# EAGLE board Relay_Dio Faziko Pratama (EAGLE 9.6.2)
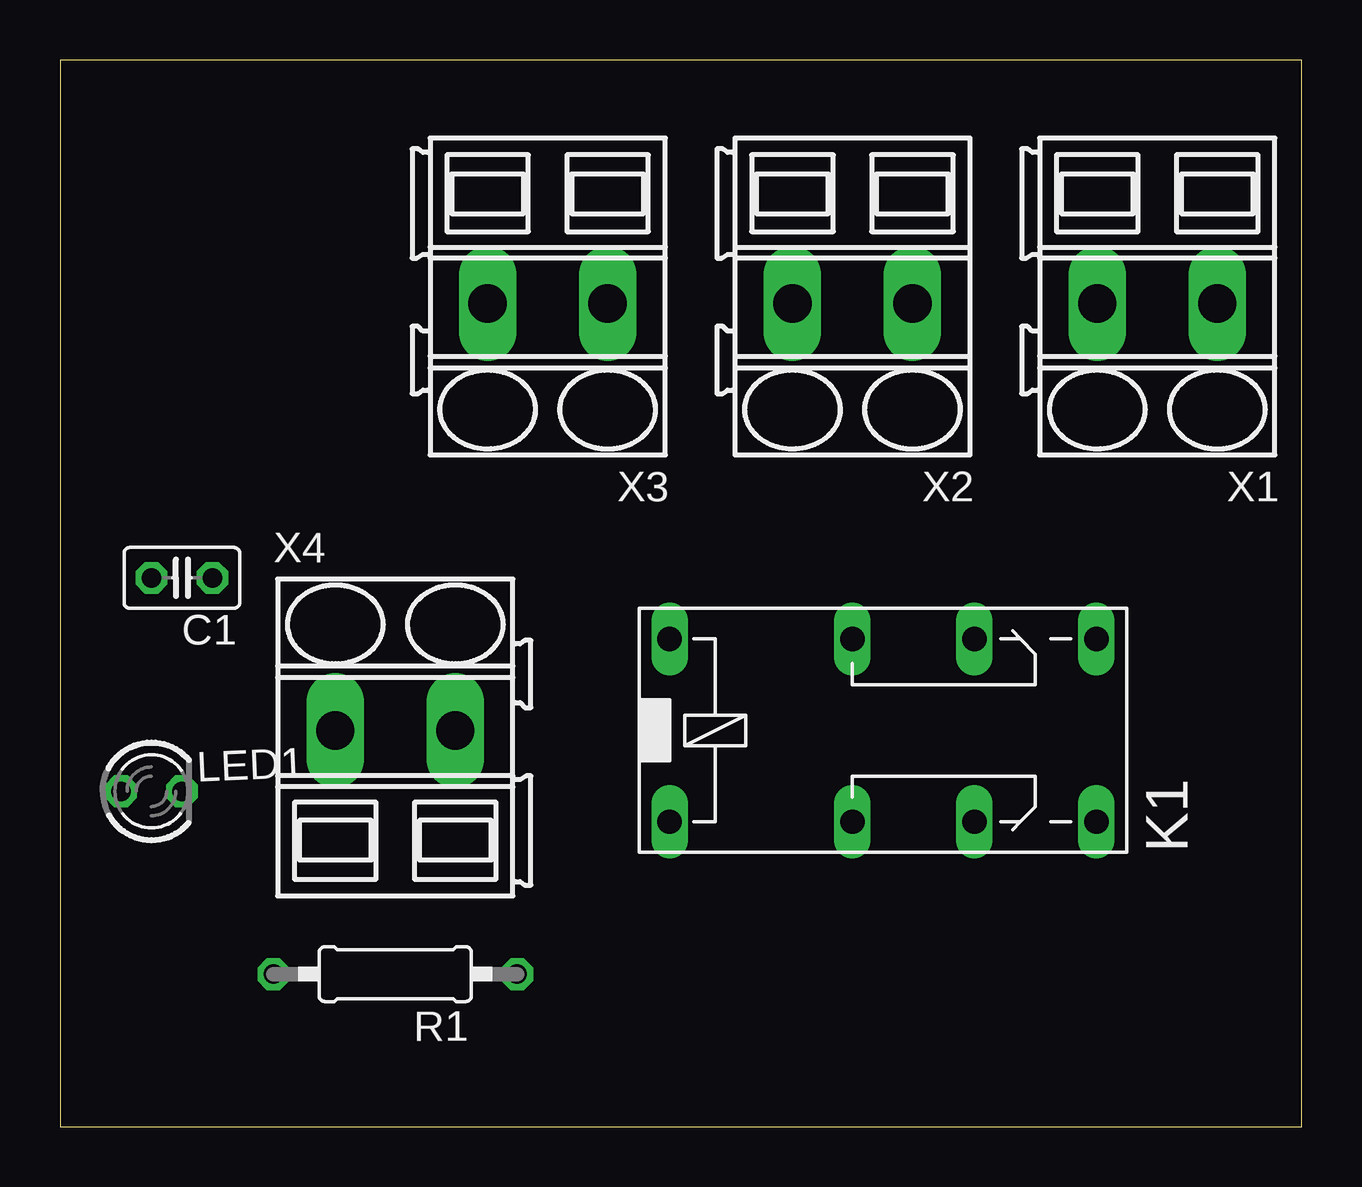
[diagram p0: board, top side]
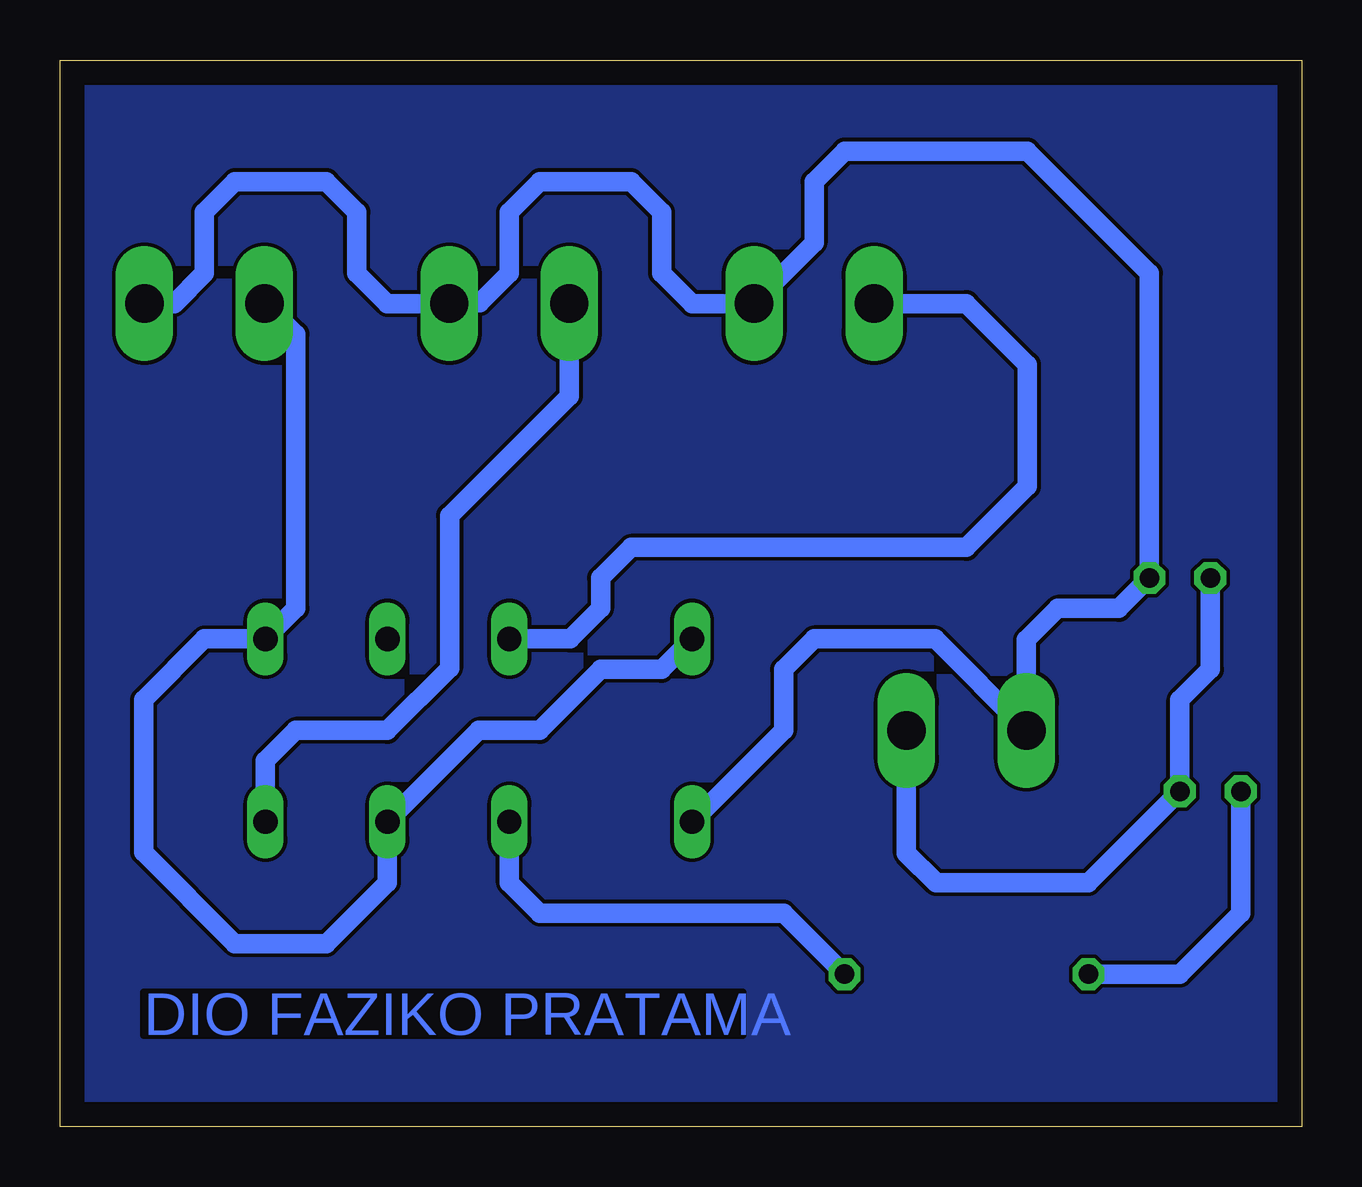
[diagram p1: board, bottom side, seen from below]

Size 51.74 x 44.44 mm. Coordinates in mm from the lower left corner, seen from the top.
Outline: 0,0 51.74,0 51.74,44.44 0,44.44 0,0
Copper layers (1*16): Top 0.035mm / dielectric 1.5mm / Bottom 0.035mm
Design rules "default": minimum track width 6mil, minimum drill 0.35mm, track to track 6mil, track to pad 6mil, pad to pad 6mil, via to via 6mil, smd to smd 6mil, copper to edge 40mil, drill to drill 6mil, minimum pad ring 10mil, minimum via ring 8mil, stop-mask expansion 4mil, vias tented up to drill 0mil, thermal gap 10mil

## Footprints (pad centres in the part's own frame; a part is rotated, then mirrored left to right if it is on the bottom)
C025-025X050 = drill 0.813 octagon: 1 -1.27,0; 2 1.27,0
351 = drill 1.016 long: 1 -3.81,-3.81; 16 -3.81,3.81; O1 8.89,-3.81; O2 8.89,3.81; P1 3.81,-3.81; P2 3.81,3.81; S1 13.97,-3.81; S2 13.97,3.81
LED3MM = drill 0.813 octagon: A -1.27,0; K 1.27,0
0207/10 = drill 0.813 octagon: 1 -5.08,0; 2 5.08,0
SMKDSP_1,5/2 = drill 1.6 pad 1.8 long: 1 -2.5,0; 2 2.5,0

## Placement (x,y rotation side)
C1  [C025-025X050]  5.08,22.86 180 top
K1  351  [351]  29.21,16.51 0 top
LED1  [LED3MM]  3.81,13.97 0 top
R1  [0207/10]  13.97,6.35 180 top
X1  SMKDSP_1,5/2  [SMKDSP_1,5/2]  45.72,34.29 180 top
X2  SMKDSP_1,5/2  [SMKDSP_1,5/2]  33.02,34.29 180 top
X3  SMKDSP_1,5/2  [SMKDSP_1,5/2]  20.32,34.29 180 top
X4  SMKDSP_1,5/2  [SMKDSP_1,5/2]  13.97,16.51 0 top

## Library data of the parts
C1 = rcl; SPICEPREFIX: C
K1 = relay; OC_FARNELL: unknown; OC_NEWARK: unknown
LED1 = led
R1 = rcl; SPICEPREFIX: R
X1-X4 = con-phoenix-smkdsp; MF: FARNELL; MPN: 1733570; OC_FARNELL: 3041244; OC_NEWARK: 69C8588

## Nets
GND: C1.1 K1.1 X1.1 X2.1 X3.1 X4.1
N$1: K1.P1 R1.1
N$2: LED1.A R1.2
O1: K1.S1 X2.2
P2: K1.P2 X3.2
S12: K1.16 K1.O1 K1.S2 X1.2
VOUT: C1.2 LED1.K X4.2

## Tracks (layer width: path | path; a pad name or v marks a point on that pad's centre or on a via)
GND
  Bottom 0.813: K1.1 21.59,16.51 21.59,19.05 20.32,20.32 15.28,20.32 X4.1 11.47,20.28 10.16,21.59 7.62,21.59 C1.1 6.35,35.56 11.43,40.64 19.05,40.64 20.32,39.37 20.32,36.83 22.86,34.29 | X1.1 46.99,34.29 45.72,35.56 45.72,38.1 44.45,39.37 40.64,39.37 39.37,38.1 39.37,35.56 38.1,34.29 X2.1 35.52,34.33 34.25,34.33 33.02,35.56 33.02,38.1 31.75,39.37 27.94,39.37 26.67,38.1 26.67,35.56 25.4,34.29 22.86,34.29 | X3.1 22.86,34.29
N$1
  Bottom 0.813: R1.1 21.59,8.89 31.75,8.89 33.02,10.16 K1.P1
N$2
  Bottom 0.813: R1.2 5.08,6.35 2.54,8.89 LED1.A
N$3
  pour Bottom: 0,44.45 0,0 52.07,0 52.07,44.45
O1
  Bottom 0.813: X2.2 30.52,30.44 35.51,25.45 35.51,19.1 38.1,16.51 41.91,16.51 43.18,15.24 K1.S1
P2
  Bottom 0.813: X3.2 13.97,34.29 11.43,31.75 11.43,26.67 13.97,24.13 27.94,24.13 29.21,22.86 29.21,21.59 30.48,20.32 K1.P2
S12
  Bottom 0.813: X1.2 43.18,34.25 43.14,34.25 41.91,33.02 41.91,21.59 K1.S2 45.72,20.32 48.26,17.78 48.26,11.43 44.45,7.62 40.64,7.62 38.1,10.16 K1.O1 34.29,16.51 31.75,16.51 29.21,19.05 26.67,19.05 K1.16
VOUT
  Bottom 0.813: X4.2 16.47,11.39 15.24,10.16 8.89,10.16 LED1.K 5.08,17.78 3.81,19.05 C1.2

## Text on the board
Bottom: DIO FAZIKO PRATAMA